# Altium PCB PCB_CL-RB-01..PcbDoc
Units mil, origin at the board's own origin, x right, y up, seen from the top; angles counter-clockwise.
Board outline 4651.84 x 2506.84 mil, 2 copper layers (Top Layer, Bottom Layer); 15 components, 10 nets, 51 pads, 0 vias.
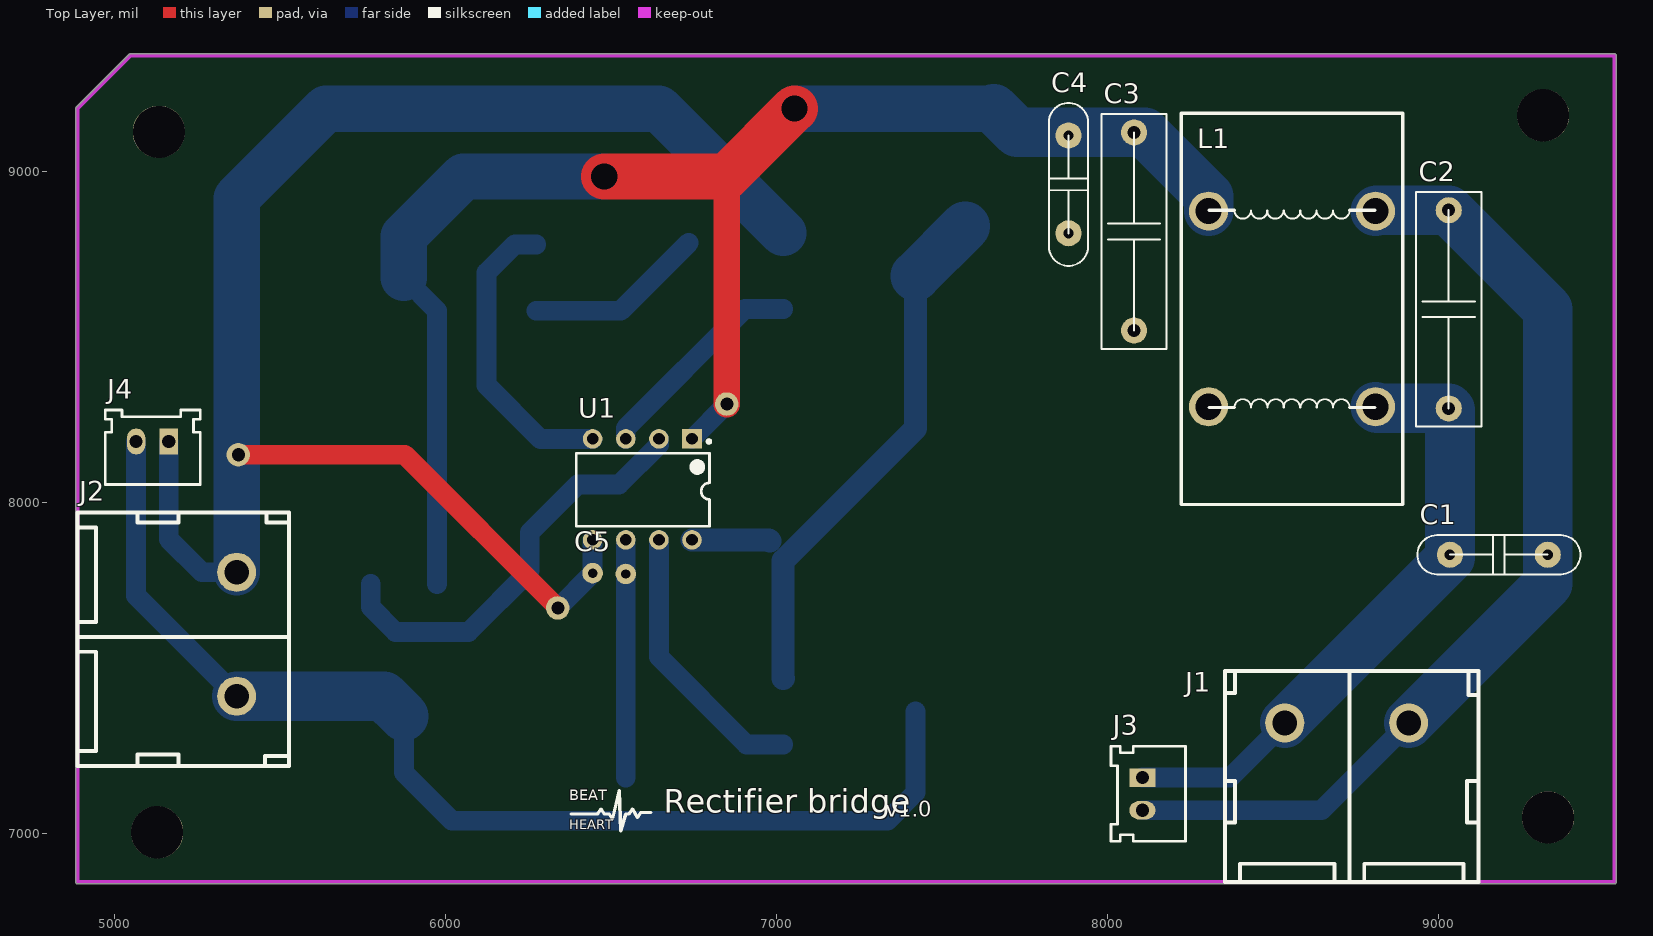
[diagram p0: Top Layer view]
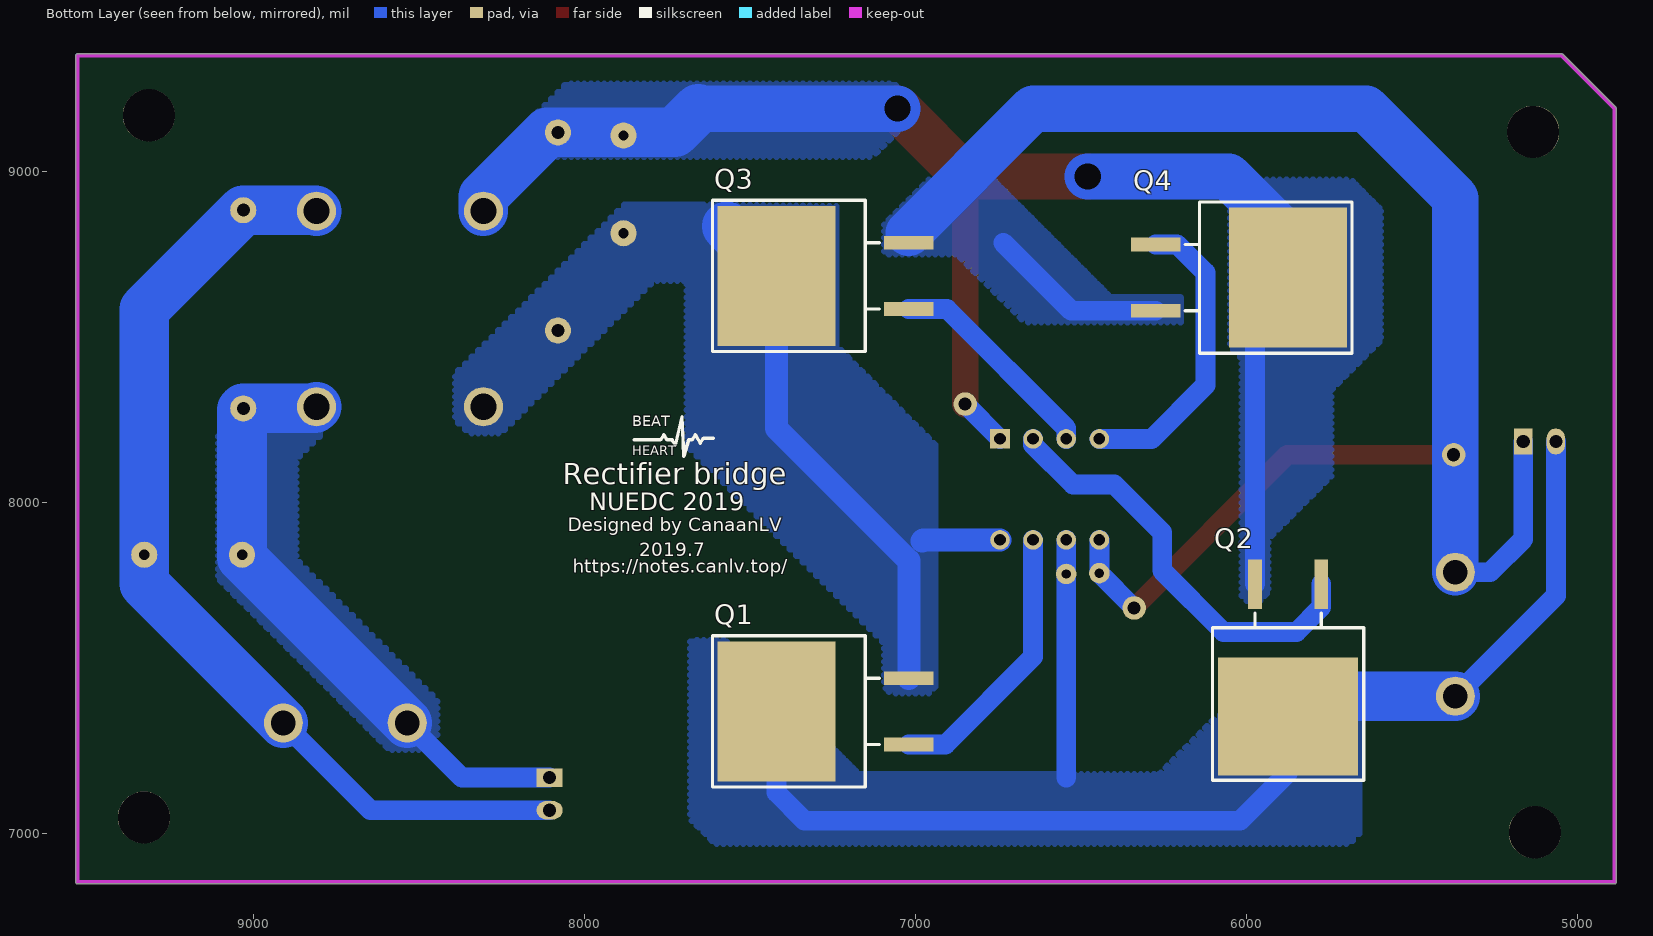
[diagram p1: Bottom Layer view, seen from below]
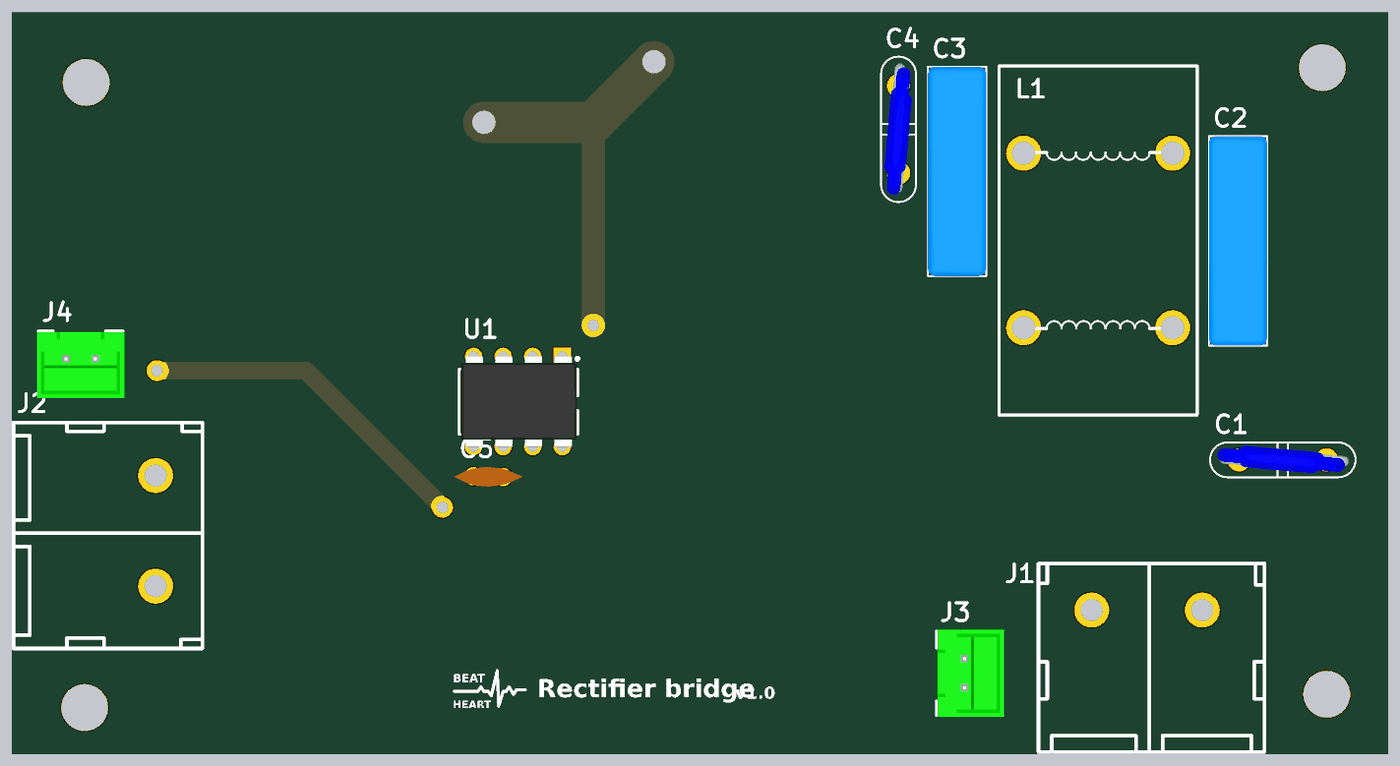
[diagram p2: 3D render of the assembled board from above, using the file's embedded part models]
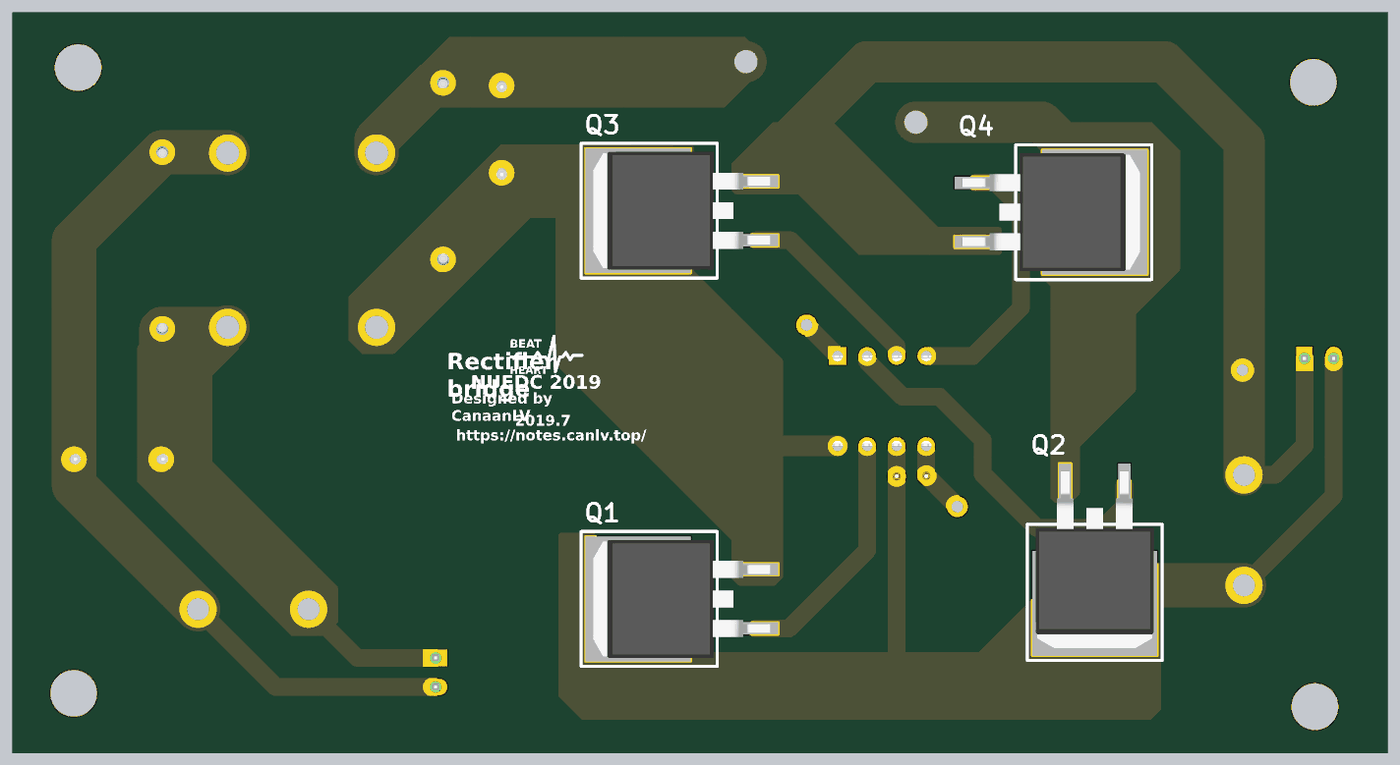
[diagram p3: 3D render of the assembled board from below, using the file's embedded part models]

## Layer stack, top to bottom
Top Solder: solder mask 0.4, Solder Resist, Dk 3.5
Top Layer: signal copper 1.4
Dielectric 1: dielectric 12.6, FR-4, Dk 4.8
Bottom Layer: signal copper 1.4
Bottom Solder: solder mask 0.4, Solder Resist, Dk 3.5

## Board outline
4890,6849.08 cw(c4890,6855) 4884.08,6855 4884.08,9190 cw(c4890,9190) 4885.83,9194.2 4885.81,9194.19 5045.81,9354.19 5045.8,9354.17 cw(c5050,9350) 5050,9355.92 9530,9355.92 cw(c9530,9350) 9535.92,9350 9535.92,6855 cw(c9530,6855) 9530,6849.08

## Design rules (kind name [scope] priority, off if disabled: settings)
Clearance [All] p1: gap=10
PlaneConnect [All] p1: planeconnectstyle=Direct reliefexpansion=20 reliefentries=4 reliefconductorwidth=10 reliefairgap=10
PolygonConnect [All] p1: connectstyle=Direct reliefconductorwidth=10 reliefentries=4 polygonreliefangle="90 Angle" airgapwidth=10
RoomDefinition Sheet_CL-RB-01 [InComponentClass('Sheet_ZhengLiu')] p1: confinementstyle=ConfineIn formatcopy=TRUE lockcomponents=FALSE outline 4880,6845 9530,6845 9530,9360 4880,9360
RoutingVias [All] p1: holewidth=28 width=50 viastyle="Through Hole" minholewidth=28 minwidth=50 maxholewidth=28 maxwidth=50
SolderMaskExpansion [All] p1: expansion=4
Width [All] p1: maxlimit=1000 minlimit=10 preferedwidth=60
29 further rules are at their usual default settings.

## Classes and differential pairs
component class Sheet_ZhengLiu: C1 C2 C3 C4 C5 J1 J2 J3 L1 Q1 Q2 Q3 Q4 U1

## Components (designator, comment, footprint, x,y, rotation, side; value= is the part's Value field where it differs from the comment)
C1 "uF" CAP-7.5-CP 8955,7725 r0 top
C2 "uF" CAP-15 9030,8285 r90 top
C3 "uF" CAP-15 8080,8520 r90 top
C4 "uF" CAP-7.5-CP 8000,8735 r90 top
C5 "uF" C0.254 6495,7785 r180 top
J1 "SIP-2" 9.5栅栏式接线端子 8535,7335 r0 top
J2 "SIP-2" 9.5栅栏式接线端子 5370,7790 r270 top
J3 "SIP-2" 2.54XH接插件2P 8105,7170 r270 top
J4 "SIP-2" 2.54XH接插件2P 5165,8185 r180 top (schematic designator J3)
L1 "双电感" L-CM(25*15*12) 8305,8290 r0 top
Q1 "CSD18535" TO-263-2 7420,7370 r90 bottom
Q2 "CSD18535" TO-263-2 5875,7355 r0 bottom
Q3 "CSD18535" TO-263-2 7420,8685 r90 bottom
Q4 "CSD18535" TO-263-2 5875,8680 r270 bottom
U1 "LT4320-1" DIP8 6595,8035 r270 top

## Footprints (in the part's own frame and the unit in brackets; to place one, negate y for a bottom-side part, rotate by r counter-clockwise, add the part's x,y. Pads: shape width x height; smd on the part's side, far side on the other; paste and mask are expansions set on the pad)
2.54XH接插件2P [mm]
  rect 1.4x2 hole 1: 1(0,0)
  oval 1.4x2 hole 1: 2(2.5,0)
  silkscreen extent -2.41,-2.41 4.88,3.3, body extent -2.51,-2.3 4.99,3.4, height 7
9.5栅栏式接线端子 [mm]
  round 3 hole 1.9: 1(0,0) 2(9.5,0)
  silkscreen extent -4.57,-12.2 14.86,4
C0.254 [mil]
  round 62 hole 28: 1(-50,0) 2(50,-2.5)
  body extent -115,-34 115,33, height 233
CAP-7.5-CP [mm]
  round 2 hole 0.8: 1(2,3) 2(9.5,3)
  silkscreen extent -0.5,1.5 12,4.5, body extent 0.05,1.59 11.45,4.41, height 16.5
CAP-15 [mm]
  round 2 hole 1: 1(0,0) 2(15.2,0)
  silkscreen extent -1.4,-2.5 16.6,2.5, body extent -1.4,-2.5 16.6,2.5, height 11
DIP8 [mm]
  rect 1.5x1.5 hole 0.9: 1(-4.013,3.81)
  round 1.5 hole 0.9: 2(-4.013,1.27) 3(-4.013,-1.27) 4(-4.013,-3.81) 5(3.734,-3.81) 6(3.734,-1.27) 7(3.734,1.27) 8(3.734,3.81)
  silkscreen extent -3.93,-5.05 2.69,5.24, body extent -4.06,-4.88 3.76,5.03, height 4.57
L-CM(25*15*12) [mm]
  round 3 hole 2: 1(12.8,0) 2(0,0) 3(12.8,15) 4(0,15)
  silkscreen extent -2.1,-7.5 14.9,22.5, body extent -2.1,-7 14.9,22, height 27
TO-263-2 [mm] "TO-263, D2PAK, 2PIN"
  rect 1.05x3.8 smd: 1(-2.54,-10.15) 3(2.54,-10.15)
  rect 10.75x9.05 smd: 2(0,0)
  silkscreen extent -5.8,-7.9 5.8,4.9, body extent -5.08,-11.39 5.08,3.87, height 5.01

## Part data
C1 C2 C3 C4 C5: library part C直插无极性
Q1 Q2 Q3 Q4: library part N-MOSFET, "N-Channel MOSFET"
U1: library part IC8

## Free pads (board coordinates)
  round 157.48 hole 157.48: 10(5135,9120) 11(9315,9170) 12(5130,7005) 13(9330,7050)
  round 70.87 hole 78.74: 14(6480,8985) 15(7055,9190)
  round 70.87 hole 39.37: 16(6850,8298) 17(6340,7682.5) 18(5375,8145)

## Nets (pads, with @x,y where several pads share a name; then routed paths per layer and width w, separated by ;. In a path a pad name is that pad's centre, name@x,y a point inside that pad or via, vN(x,y) a via of type N, cw(c..) or ccw(c..) an arc to the next point about the centre after c; other vN are vias at no path point)
IN_1: C3.1 C4.1 L1.2 Q1.3 Q3.2 U1.8 | length 1829.2
  Bottom Layer w70: U1.8 6977,7888 6980,7885 ; Q1.3 7020,7470.39 7020,7825 7420,8225 Q3.2
  Bottom Layer w150: Q3.2 Q3.2@7570,8835
IN_2: C3.2 C4.2 L1.4 pad.14 pad.15 pad.16 Q2.3 Q4.2 U1.1 | length 4671
  Top Layer w80: pad.16 6850,8985
  Top Layer w140: pad.14 6850,8985 pad.15
  Bottom Layer w60: Q4.2 5975,8580 Q2.3 ; U1.1 pad.16
  Bottom Layer w140: Q4.2 5875,8805 6055,8985 pad.14 ; pad.15 7655.91,9190
  Bottom Layer w150: 7655.91,9190 7727.48,9118.42 C3.2 8111.57,9118.42 8305,8925 L1.4
NetC1_1: C1.1 C2.1 J1.1 J3.1 L1.1 | length 1879.6
  Bottom Layer w60: J3.1 8370,7170 J1.1
  Bottom Layer w150: J1.1 9033.74,7833.74 C1.1 9033.74,8281.26 C2.1 8813.94,8285 L1.1
NetC1_2: C1.2 C2.2 J1.2 J3.2 L1.3 | length 2981.6
  Bottom Layer w60: J3.2 8645.59,7071.57 J1.2
  Bottom Layer w150: L1.3 8811.81,8883.42 C2.2 9329.02,8584.41 C1.2 9329.02,7755 J1.2
NetQ1_1: Q1.1 U1.7 | length 838.2
  Bottom Layer w60: U1.7 6645,7535 6910,7270 Q1.1
NetQ2_1: Q2.1 U1.2 | length 1290.1
  Bottom Layer w60: Q2.1 5775,7685 5850,7610 6070,7610 6255,7795 6255,7910 6400,8055 6525,8055 6645,8175 U1.2
NetQ3_1: Q3.1 U1.3 | length 656.5
  Bottom Layer w60: U1.3 6545,8225 6905,8585 Q3.1
NetQ4_1: Q4.1 U1.4 | length 911.9
  Bottom Layer w60: Q4.1 6210,8780 6125,8695 6125,8355 6287,8193 U1.4
OUT_+: C5.1 J2.2 J4.2 Q1.2 Q2.2 U1.6 | length 4198.2
  Bottom Layer w60: J4.2 5066.57,7719.41 J2.2 ; Q2.2 5875,7185 6020,7040 7335,7040 7420,7125 Q1.2 ; 6545,7170 C5.1 U1.6
  Bottom Layer w150: J2.2 5814.02,7415.98 Q2.2
OUT_-: C5.2 J2.1 J4.1 pad.17 pad.18 Q3.3 Q4.3 U1.5 | length 5569.6
  Top Layer w60: pad.18 5877.5,8145 pad.17
  Bottom Layer w60: J4.1 5165,7890 5265,7790 J2.1 ; Q4.3 6530,8580 6735,8785 ; pad.17 C5.2 U1.5 ; Q3.3 7020.39,8814.61
  Bottom Layer w140: J2.1 5370,8920 5640,9190 6645,9190 7020.39,8814.61

## Polygon pours and split planes (outlines as drawn)
IN_1 on Bottom Layer "IN_1_L02_P000" (hatched 90Degree grid 20 track 20, remove dead copper, pour order 0): 7690,8900.36 7690,8170 7315,7795 7095,7575 7095,7445 7075,7425 6960,7425 6940,7445 6940,8175 7240,8475 7240,8895
OUT_- on Bottom Layer "OUT_-_L02_P002" (hatched 90Degree grid 20 track 20, remove dead copper, pour order 2): 6200,8545 6670,8545 6760,8635 6875,8750 7085,8750 7095,8760 7095,8840 6960,8975 6765,8975 6465,8675 6410,8620 6200,8620
OUT_+ on Bottom Layer "OUT_+_L02_P004" (hatched 90Degree grid 20 track 20, remove dead copper, pour order 4): 6085,7360 6265,7180 7170,7180 7575,7585 7680,7585 7680,7045 7605,6970 5690,6970 5660,7000 5660,7335 5685,7360
IN_2 on Bottom Layer "IN_2_L02_P010" (hatched 90Degree grid 20 track 20, remove dead copper, pour order 10): 5960,8975 5685,8975 5595,8885 5595,8490 5745,8340 5745,8080 5935,7890 5935,7730 5960,7705 6005,7705 6015,7715 6015,7760 6015,8435 6045,8465 6050,8470 6050,8975
IN_2 on Bottom Layer "IN_2_L02_P012" (hatched 90Degree grid 20 track 20, remove dead copper, pour order 12): 8085,9045 7130,9045 7010,9165 7010,9210 7065,9265 8055,9265 8180,9140
IN_1 on Bottom Layer "IN_1_L02_P014" (hatched 90Degree grid 20 track 20, remove dead copper, pour order 14): 7645,8900.36 7879.64,8900.36 8390,8390 8390,8250 8350,8210 8250,8210 7790,8670 7645,8670
NetC1_1 on Bottom Layer "NETC1_1_L02_P016" (hatched 90Degree grid 20 track 20, remove dead copper, pour order 16): 8780,8220 8870,8130 8870,7830 8445,7405 8445,7295 8485,7255 8590,7255 9105,7770 9105,8220

## Keep-outs
Keep-Out Layer:
  lines w11.81: 4890,6855 9530,6855 9530,9350 5050,9350 4890,9190 4890,6855

## Silkscreen, mask and mechanical layers (free items; w line width, h text height)
Top Overlay:
  lines w10: 6380,7060 6460,7060 6470,7075 6480,7060 6495,7060 6505,7045 6525,7130 6530,7010 6545,7060 6555,7060 6565,7075 6580,7050 6590,7065 6620,7065
  text "BEAT" at 6375,7091 h55
  text "Rectifier bridge" at 6660,7040 h120
  text "v1.0" at 7330,7035 h80
  text "HEART" at 6375,7003 h50
Bottom Overlay:
  lines w10: 7610,8195 7640,8195 7650,8180 7665,8205 7675,8190 7685,8190 7700,8140 7705,8260 7725,8175 7735,8190 7750,8190 7760,8205 7770,8190 7850,8190
  text "BEAT" at 7855,8221 h55
  text "HEART" at 7855,8133 h50
  text "Rectifier bridge" at 8065,8035 h110
  text "NUEDC 2019" at 7985,7960 h90
  text "Designed by CanaanLV" at 8050,7900 h70
  text "2019.7" at 7835,7825 h70
  text "https://notes.canlv.top/" at 8035,7775 h70